# Altium PCB CLARA_Mainboard.PcbDoc
Units mm, origin at the board's own origin, x right, y up, seen from the top; angles counter-clockwise.
Board outline 44.16 x 42.91 mm, 2 copper layers (Top Layer, Bottom Layer); 14 components, 5 nets, 99 pads, 22 vias.
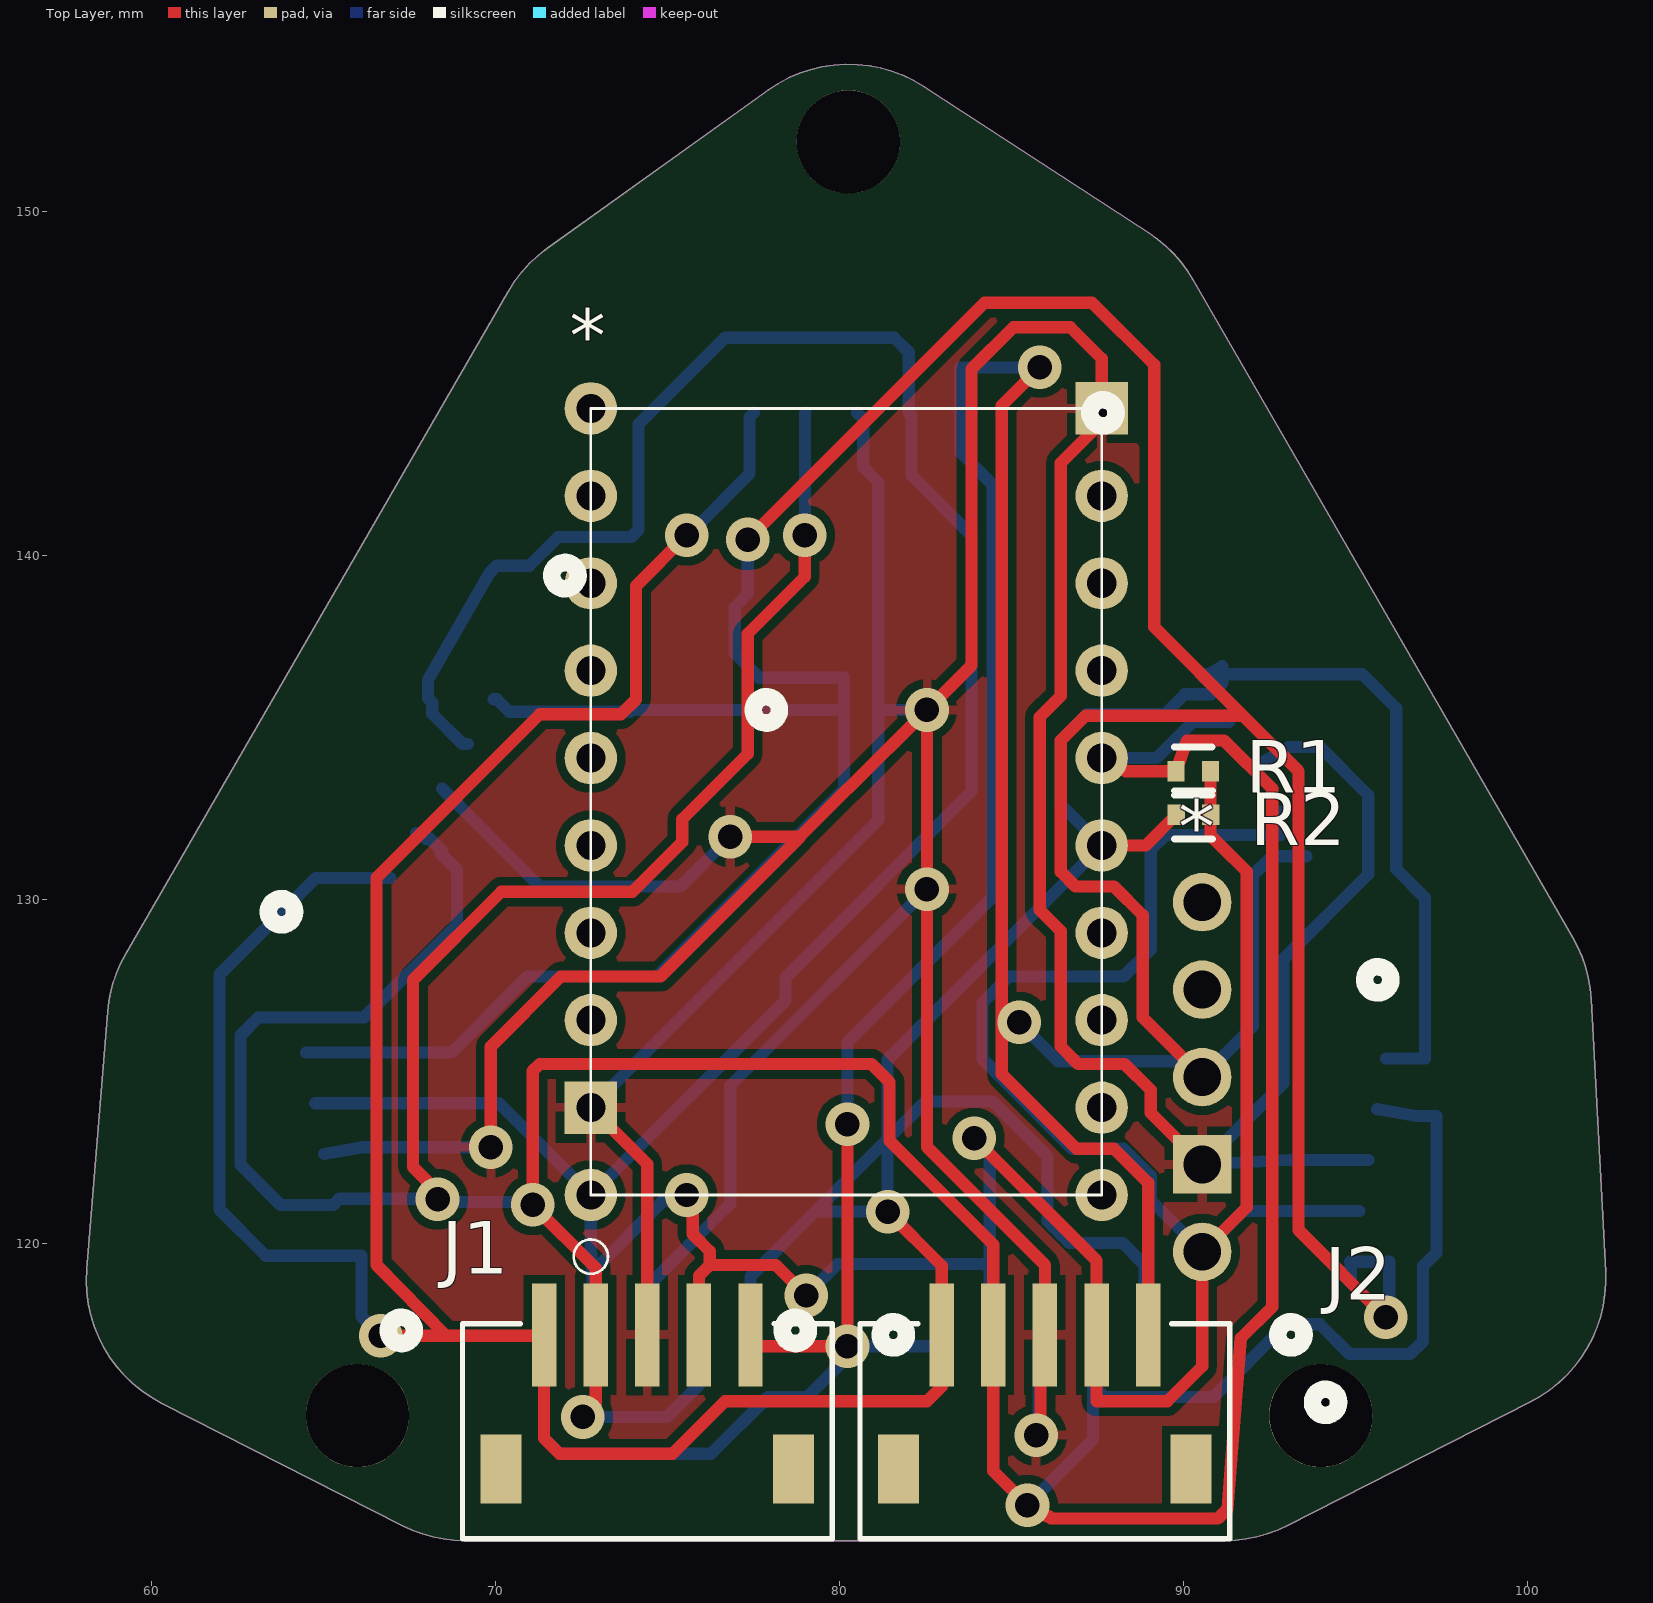
[diagram p0: Top Layer view]
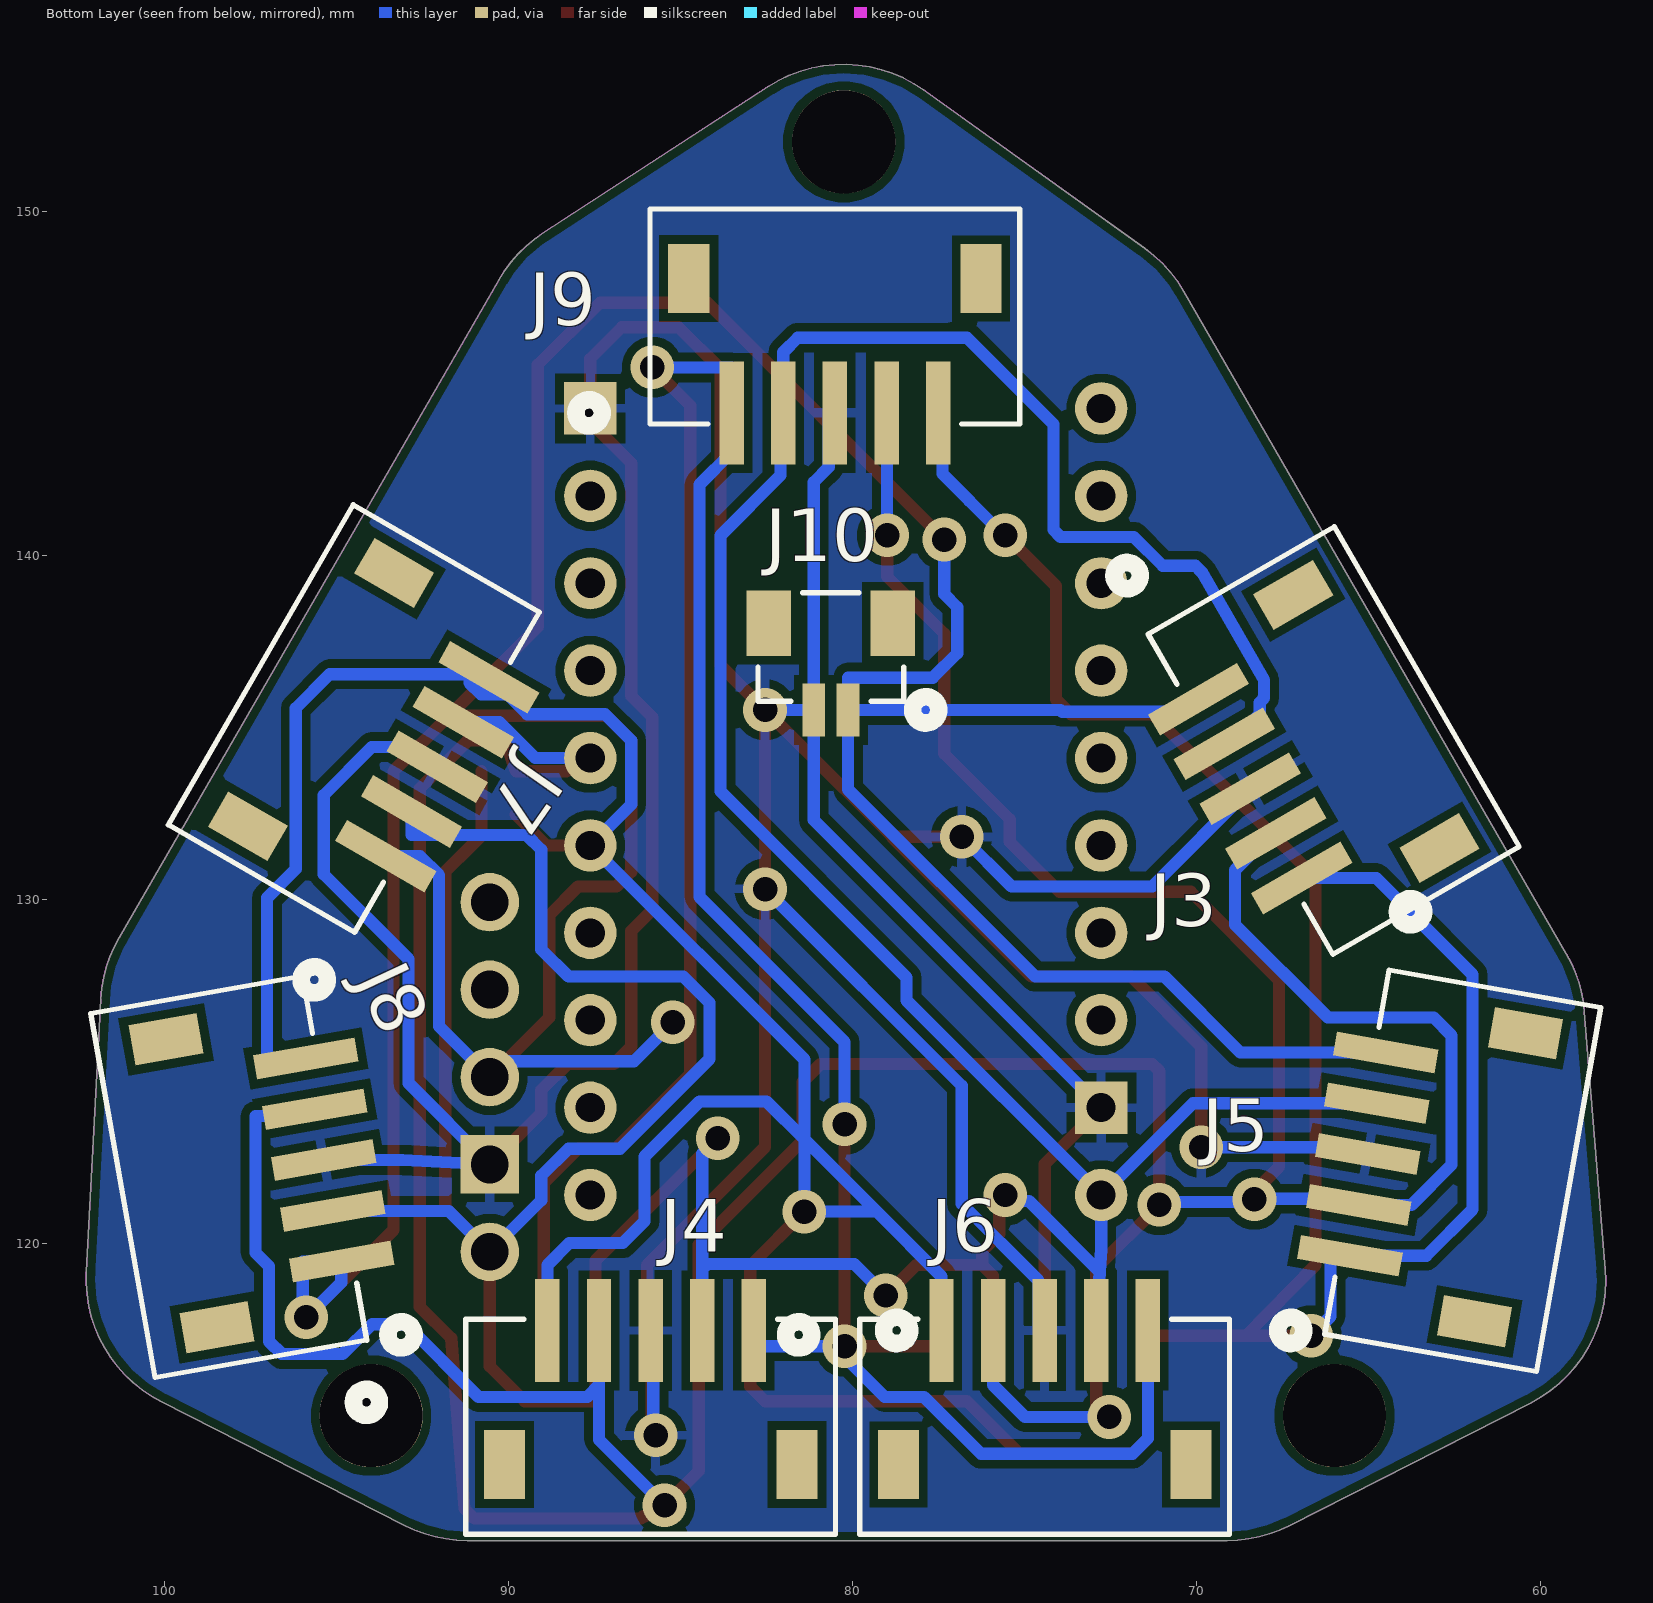
[diagram p1: Bottom Layer view, seen from below]

## Layer stack, top to bottom
Top Solder: solder mask 0.0102, Solder Resist, Dk 3.5
Top Layer: signal copper 0.0356
Dielectric 1: dielectric 0.32, FR-4, Dk 4.8
Bottom Layer: signal copper 0.0356
Bottom Solder: solder mask 0.0102, Solder Resist, Dk 3.5

## Board outline
60.303,115.364 67.307,111.801 ccw(c69.121,115.366) 69.121,111.366 91.203,111.366 ccw(c91.203,115.366) 93.017,111.801 100.093,115.401 ccw(c98.28,118.966) 102.274,119.178 101.853,127.107 ccw(c97.859,126.895) 101.323,128.895 90.282,148.019 ccw(c86.818,146.019) 88.999,149.372 82.451,153.63 ccw(c80.27,150.277) 77.942,153.529 71.515,148.927 ccw(c73.844,145.675) 70.379,147.675 59.262,128.418 ccw(c62.726,126.418) 58.739,126.742 58.13,119.254 ccw(c62.116,118.93)

## Design rules (kind name [scope] priority, off if disabled: settings)
Clearance [All] p1: gap=0.254 ignorepadtopadclearanceinfootprint=FALSE except(0: Arc-Hole Track-Hole SMDPad-Hole THPad-Hole Via-Hole Fill-Hole Poly-Hole Region-Hole Text-Hole)
HoleSize [All] p1: absolutevalues=TRUE maxlimit=2.54 minlimit=0.3 maxpercent=80.000 minpercent=20.000
PolygonConnect [All] p1: connectstyle=Relief reliefconductorwidth=0.254 reliefentries=4 polygonreliefangle="90 Angle" airgapwidth=0.254
RoutingVias [All] p1: holewidth=0.711 width=1.27 viastyle="Through Hole" minholewidth=0.3 minwidth=1.27 maxholewidth=0.711 maxwidth=1.27
SolderMaskExpansion SolderMaskExpansion_1 [All] p1 off: expansion=0.102 istentingtop=FALSE
SolderMaskExpansion [IsVia] p2: expansion=0.102 istentingtop=TRUE
Width [All] p1: maxlimit=0.356 minlimit=0.356 preferedwidth=0.356 minimp=50.000000 maximp=50.000000 favimp=50.000000
29 further rules are at their usual default settings.

## Components (designator, comment, footprint, x,y, rotation, side; value= is the part's Value field where it differs from the comment)
* "Pololu D24V10F3 3.3V Buck Regulator" PCBComponent_1 90.551,119.761 r0 top
* "TinyPICO" "TinyPICO Board" 65.16,118.872 r90 top
J1 "S5B-ZR-SM4A-TF (LF) (SN)" CONN_S5B-ZR-SM4A-TF_JST 77.422,117.348 r180 top
J2 "S5B-ZR-SM4A-TF (LF) (SN)" CONN_S5B-ZR-SM4A-TF_JST 88.979,117.348 r180 top
J3 "S5B-ZR-SM4A-TF (LF) (SN)" CONN_S5B-ZR-SM4A-TF_JST 69.953,135.821 r240 bottom
J4 "S5B-ZR-SM4A-TF (LF) (SN)" CONN_S5B-ZR-SM4A-TF_JST 82.876,117.475 r0 bottom
J5 "S5B-ZR-SM4A-TF (LF) (SN)" CONN_S5B-ZR-SM4A-TF_JST 64.51,125.556 r280 bottom
J6 "S5B-ZR-SM4A-TF (LF) (SN)" CONN_S5B-ZR-SM4A-TF_JST 71.422,117.475 r0 bottom
J7 "S5B-ZR-SM4A-TF (LF) (SN)" CONN_S5B-ZR-SM4A-TF_JST 93.575,131.26 r120 bottom
J8 "S5B-ZR-SM4A-TF (LF) (SN)" CONN_S5B-ZR-SM4A-TF_JST 94.856,119.474 r80 bottom
J9 "S5B-ZR-SM4A-TF (LF) (SN)" CONN_S5B-ZR-SM4A-TF_JST 83.518,144.145 r180 bottom
J10 "BM02B-SRSS-TB (LF)(SN)" CONN_BM02B-SRSS-TB_JST 80.637,137.339 r0 bottom
R1 "RMCF0402JT4K70 - 4.7 kOhm - 1/16W" FP-RMCF0402-MFG 90.289,133.731 r0 top
R2 "RMCF0402JT4K70 - 4.7 kOhm - 1/16W" FP-RMCF0402-MFG 90.297,132.461 r0 top

## Footprints (in the part's own frame and the unit in brackets; to place one, negate y for a bottom-side part, rotate by r counter-clockwise, add the part's x,y. Pads: shape width x height; smd on the part's side, far side on the other; paste and mask are expansions set on the pad)
CONN_BM02B-SRSS-TB_JST [mil]
  rect 26x61 smd paste+0 mask+0: 1(-19.68,72.04) 2(19.69,72.04)
  rect 51x75 smd: 3(-70.87,-27.37) 4(70.87,-27.37)
  silkscreen extent -123,-62 84,87, body extent 0,0 10,10, height 10
CONN_S5B-ZR-SM4A-TF_JST [mil]
  rect 28x118 smd paste+0 mask+0: 1(0,0) 2(59.05,0) 3(118.11,0) 4(177.17,0) 5(236.22,0)
  rect 47x79 smd: 6(-49.21,153.62) 7(285.43,153.62)
  silkscreen extent -178,-15 330,233, body extent 0,0 10,10, height 10
FP-RMCF0402-MFG [mm]
  rect 0.5x0.6 smd paste+0 mask+0: 1(-0.5,0) 2(0.5,0)
  silkscreen extent -0.55,-0.7 0.55,0.7, body extent -0.85,-0.4 0.85,0.4, height 0.25
PCBComponent_1 [mm]
  rect 1.7x1.7 hole 1.1: GND(0,2.54)
  round 1.7 hole 1.1: PG(0,10.16) SHDN(0,7.62) VIN(0,5.08) VOUT(0,0)
"TinyPICO Board" [mil]
  round 60 hole 33.23: 3V3(400,-300) 4(500,-300) 5(400,-884.65) 5V(300,-300) 14(600,-300) 15(700,-300) 18(300,-884.65) 19(200,-884.65) 21(600,-884.65) 22(500,-884.65) 25(1000,-300) 26(900,-300) 27(800,-300) 32(700,-884.65) 33(800,-884.65) RST(900,-884.65)
  round 60 hole 33.24: 23(100,-884.65) BAT(100,-300)
  rect 60x60 hole 33.23: G(200,-300) G(1000,-884.65)
  Top Layer lines w10: 1000,-869.29 992.32,-876.97 989.82,-879.47 984.65,-884.65
  silkscreen extent 10,-885 1000,-280

## Part data
*: library part Component_1
J1 J2 J3 J4 J5 J6 J7 J8 J9 J10: "No Description Available", Mfr_Name=JST, Copyright="Copyright (C) 2021 Ultra Librarian. All rights reserved.", RefDes=RefDes, Type=DEV
  J1 J2 J3 J4 J5 J6 J7 J8 J9: Manufacturer_Part_Number="S5B-ZR-SM4A-TF (LF) (SN)"
  J10: Manufacturer_Part_Number="BM02B-SRSS-TB (LF)(SN)"
R1 R2: library part CMP-2000-06988-2, "4.7kΩ ±5% 0.063W 0402 Thick Film Chip Resistor AEC-Q200 compliant", Case Code (Imperial)=0402, Case Code (Metric)=1005, Max Operating Temperature=155°C, Max Power Dissipation=63mW, Min Operating Temperature=-55°C, Resistance=4.7kR, Resistor Type="Thick Film", Temperature Coefficient=100ppm/°C, Tolerance=5%, Case/Package=0402, Construction=Rectangular, Contact Plating=Tin, Depth=0.5mm, Features="Automotive AEC-Q200", Height=0.016inch, Lead Free="Lead Free", Length=0.039inch, Military Standard=Not, Mount="Surface Mount", Number of Terminations=2, Packaging="Tape and Reel", Power Rating=63mW, Radiation Hardening=No, RoHS Compliant=Yes, Series=RMCF, Width=0.02inch

## Free pads (board coordinates)
  round 3 hole 3 unplated: 4(66,115) 4(80.264,152.019) 4(94,115)

## Via types
v1: diameter 1.27, hole 0.711, Top Layer to Bottom Layer, tented both sides, 22 vias

## Nets (pads, with @x,y where several pads share a name; then routed paths per layer and width w, separated by ;. In a path a pad name is that pad's centre, name@x,y a point inside that pad or via, vN(x,y) a via of type N, cw(c..) or ccw(c..) an arc to the next point about the centre after c; other vN are vias at no path point)
GND: *.G *.GND J1.3 J2.3 J3.3 J4.3 J5.3 J6.3 J7.3 J8.3 J9.3 J10.2 | length 175.2
  Top Layer w0.356: v1(69.875,122.8) 69.875,125.73 71.907,127.762 74.803,127.762 78.86,131.819 ; *.G@72.78,123.952 74.422,122.31 J1.3 ; v1(76.835,131.826) 78.853,131.826 80.25,133.223 ; 80.264,133.223 v1(82.55,135.509) ; v1(85.725,114.427) 85.852,114.554 85.852,117.221 J2.3 85.979,119.38 82.55,122.809 v1(82.55,130.302) v1(82.55,135.509) ; *.G@87.24,144.272 *.G@87.63,144.272 ; *.GND 89.052,123.8 89.052,124.46 88.29,125.222 86.944,125.222 86.436,125.73 86.436,129.083 85.827,129.692 85.827,135.306 86.436,135.915 86.436,142.688 87.63,143.882 *.G@87.63,144.272 ; v1(82.55,135.509) 83.845,136.804 83.845,145.415 85.065,146.634 86.716,146.634 87.63,145.72 *.G@87.63,144.272
  Bottom Layer w0.356: J5.3 66.156,122.8 v1(69.875,122.8) ; J3.3 71.298,130.378 75.387,130.378 v1(76.835,131.826) ; *.G@72.78,123.952 81.137,132.309 J10.2 ; J6.3 74.6,117.653 74.6,118.923 76.835,121.158 76.835,124.587 v1(82.55,130.302) ; J9.3 80.696,143.967 80.696,142.57 81.137,142.129 J10.2 ; v1(82.55,135.509) J10.2 ; v1(85.725,114.427) 85.801,114.503 85.801,117.399 J4.3 ; J7.3 93.065,134.429 93.98,134.429 95.377,133.032 95.377,130.734 92.913,128.27 92.913,124.663 *.GND 93.091,122.428 J8.3
SCL: *.22 J1.5 J2.5 J3.5 J4.5 J5.5 J6.5 J7.5 J8.5 J9.5 R2.1 | length 145.6
  Top Layer w0.356: v1(66.675,117.323) 68.58,117.323 ; J1.5 J1.5@71.422,117.323 ; v1(75.565,140.589) 74.092,139.116 74.092,135.814 73.66,135.382 71.298,135.382 66.548,130.632 66.548,119.38 68.58,117.323 ; v1(81.407,120.929) 82.979,119.357 J2.5 82.979,115.847 82.55,115.418 76.679,115.418 75.155,113.894 71.871,113.894 71.422,114.343 J1.5@71.422,117.323 ; *.22 88.908,131.572 R2.1 ; 68.58,117.323 J1.5@71.422,117.323
  Bottom Layer w0.356: v1(66.675,117.323) 66.116,117.881 66.116,119.647 J5.5 63.334,119.647 61.987,120.995 61.987,127.824 64.788,130.625 J3.5 ; v1(75.565,140.589) 75.613,140.589 76.614,141.59 76.614,141.597 77.391,142.374 77.391,144.018 J9.5 ; J6.5 77.422,119.046 79.306,120.929 ; J4.5 88.876,119.38 88.241,120.015 86.687,120.015 86.052,120.65 86.052,122.533 84.455,124.13 82.506,124.13 81.407,123.031 ; J8.5 97.028,125.382 97.028,130.048 96.19,130.886 96.19,135.56 95.199,136.55 J7.5@91.136,136.55 ; 79.306,120.929 81.407,123.031 ; 79.306,120.929 v1(81.407,120.929) 81.407,123.031 ; 81.407,123.031 81.407,125.349 *.22 86.436,132.766 86.436,134.62 87.198,135.382 89.459,135.382 90.043,135.966 90.805,135.966 91.136,136.297 J7.5@91.136,136.55 ; J7.5@90.738,136.55 J7.5@91.136,136.55 ; J7.5@90.738,136.55 90.669,136.55 J7.5 J7.5@90.738,136.55 ; J7.5@90.738,136.55 91.136,136.78 J7.5@91.136,136.55
SDA: *.21 J1.4 J2.4 J3.4 J4.4 J5.4 J6.4 J7.4 J8.4 J9.4 R1.1 | length 158.2
  Top Layer w0.356: v1(68.326,121.285) 68.326,121.515 67.615,122.226 67.615,127.66 70.18,130.226 73.99,130.226 75.438,131.674 75.438,132.334 77.343,134.239 77.343,137.722 78.999,139.378 v1(78.999,140.584) ; v1(72.542,114.96) 72.922,115.34 J1.4 72.922,119.293 v1(71.09,121.125) 71.09,125.014 71.298,125.222 80.939,125.222 81.462,124.699 81.462,122.987 84.479,119.969 J2.4 84.479,113.387 v1(85.471,112.395) 85.718,112.395 86.038,112.075 86.092,112.075 86.157,112.011 91.005,112.011 91.286,112.292 91.669,117.246 92.583,118.161 92.583,133.223 91.186,134.62 90.106,134.62 R1.1 88.327,133.731 87.946,134.112 *.21
  Bottom Layer w0.356: J3.4 67.824,131.924 J3.4@67.988,131.759 ; J3.4@68.049,131.82 68.467,131.402 J3.4@68.426,131.351 ; J3.4@68.411,131.336 68.891,130.857 68.891,129.267 66.192,126.568 63.117,126.568 62.596,126.047 62.596,122.29 63.762,121.125 J5.4 65.47,121.304 68.307,121.304 v1(68.326,121.285) 68.406,121.205 71.01,121.205 v1(71.09,121.125) ; v1(72.542,114.96) 74.995,114.96 75.922,115.887 J6.4 ; v1(78.999,140.584) 79.009,140.593 79.009,144.136 J9.4 ; v1(85.471,112.395) 87.376,114.3 87.376,115.887 ; J4.4 87.376,115.887 ; *.21 89.23,134.112 90.275,135.157 J7.4 ; J8.4 96.763,123.707 97.358,123.707 97.358,119.736 96.964,119.341 96.964,117.157 96.594,116.787 94.83,116.787 93.965,117.653 92.989,117.653 90.881,115.545 87.719,115.545 87.376,115.887
VBAT: *.VIN J1.1 J2.1 J3.1 J4.1 J5.1 J6.1 J7.1 J8.1 J9.1 J10.1 | length 206.9
  Top Layer w0.356: v1(77.343,140.462) 84.226,147.345 87.351,147.345 89.154,145.542 89.154,137.922 91.754,135.322 ; J1.1 77.422,117.018 v1(80.239,117.018) ; v1(80.239,123.469) v1(80.239,117.018) ; v1@80.543,117.018 v1(80.239,117.018) ; v1(85.23,126.428) 84.723,126.936 ; v1(85.827,145.466) 84.723,144.362 84.723,126.936 ; J2.1 88.979,121.765 87.986,122.758 86.893,122.758 84.723,124.929 84.723,126.936 ; *.VIN 88.824,126.568 88.824,129.54 87.986,130.378 86.868,130.378 86.436,130.81 86.436,134.62 87.155,135.338 91.738,135.338 93.345,133.731 93.345,120.396 v1(95.885,117.856)
  Bottom Layer w0.356: J5.1 68.736,125.556 70.942,127.762 74.698,127.762 80.137,133.201 J10.1 ; J3.1 70.046,135.821 70.409,135.458 73.914,135.458 73.965,135.509 J10.1 ; J6.1 71.422,114.343 71.871,113.894 76.276,113.894 77.927,115.545 79.07,115.545 v1@80.543,117.018 ; v1(77.343,140.462) 77.343,138.878 76.962,138.497 76.962,137.16 77.673,136.449 80.137,136.449 J10.1 ; v1(80.239,117.018) v1@80.543,117.018 ; v1(80.239,123.469) 80.239,125.857 84.455,130.073 84.455,142.065 83.518,143.002 83.518,145.466 v1(85.827,145.466) ; J4.1 82.876,117.018 v1@80.543,117.018 ; v1(85.23,126.428) 86.36,125.298 90.094,125.298 *.VIN 92.024,126.314 92.024,130.708 92.576,131.26 J7.1 ; J8.1 J8.1@94.869,119.474 ; J8.1@94.869,119.474 94.869,118.872 v1(95.885,117.856) 95.987,117.958 95.987,119.474 J8.1@94.869,119.474
VCC: *.BAT *.VOUT J1.2 J2.2 J3.2 J4.2 J5.2 J6.2 J7.2 J8.2 J9.2 R1.2 R2.2 | length 148.5
  Top Layer w0.356: v1(75.565,121.412) 75.74,121.237 75.74,120.278 76.24,119.779 76.24,119.38 ; J1.2 75.922,119.062 76.24,119.38 ; v1(79.045,118.491) 78.156,119.38 76.24,119.38 ; v1(83.922,123.063) 87.479,119.506 J2.2 87.479,115.418 89.535,115.418 90.551,116.434 *.VOUT 91.846,121.056 91.846,130.81 91.084,131.572 90.793,131.864 90.793,132.457 R2.2 ; R2.2@90.789,132.461 R1.2
  Bottom Layer w0.356: J5.2 70.113,124.079 *.BAT ; J3.2 69.053,134.522 68.174,135.401 68.174,135.728 68.046,135.856 68.046,136.378 69.861,139.522 70.039,139.7 70.993,139.7 71.831,140.538 73.96,140.538 74.168,140.747 74.168,143.815 76.683,146.329 81.597,146.329 82.018,145.909 J9.2 82.1,144.063 82.1,142.329 83.845,140.583 83.845,133.147 78.435,127.737 78.435,127.067 *.BAT ; J6.2 72.82,119.175 ; v1(75.565,121.412) 75.39,121.237 74.882,121.237 72.82,119.175 ; v1(79.045,118.491) 79.959,119.405 84.224,119.405 84.376,119.253 ; v1(83.922,123.063) 84.376,122.609 84.376,119.253 ; J4.2 84.376,119.253 ; J7.2 92.825,131.877 89.484,131.877 89.052,131.445 89.052,128.549 88.265,127.762 84.925,127.762 84.163,127 84.163,125.362 86.766,122.758 88.265,122.758 89.052,121.971 89.052,121.26 *.VOUT 91.741,120.951 J8.2 ; *.BAT 72.78,119.837 72.806,119.407 72.82,119.175
pads on no net: *.3V3 *.4 *.5 *.5V *.14 *.15 *.18 *.19 *.23 *.25 *.26 *.27 *.32 *.33 *.PG *.RST *.SHDN J1.6 J1.7 J2.6 J2.7 J3.6 J3.7 J4.6 J4.7 J5.6 J5.7 J6.6 J6.7 J7.6 J7.7 J8.6 J8.7 J9.6 J9.7 J10.3 J10.4

## Polygon pours and split planes (outlines as drawn)
GND on Top Layer "GND_L01_P000" (solid, remove dead copper, pour order 0): 41.275,161.163 119.38,161.163 121.793,158.75 120.65,157.607 120.65,107.061 39.624,107.061 39.243,107.442
GND on Bottom Layer "GND_L02_P001" (solid, remove dead copper, pour order 1): 42.418,161.036 48.006,155.448 118.999,155.448 118.999,114.808 113.665,109.474 49.149,109.474

## Keep-outs
Keep-Out Layer:
  the board outline again, w0.013

## Silkscreen, mask and mechanical layers (free items; w line width, h text height)
Mechanical 1:
  lines w0.013: 67.064,113.731 ccw(c67.497,113.981) 67.93,114.231 ; 92.417,114.268 ccw(c92.85,114.018) 93.283,113.768

## Text inside footprints (layer, text, board x,y; h text height)
J1: Mechanical 7 "Default Padstyle: RX28Y118D0T" at 83.629,122.911 h1.27 r180; Mechanical 7 "1st Mtg Padstyle: RX79Y47D0T" at 83.312,124.816 h1.27 r180; Mechanical 7 "2nd Mtg Padstyle: EX70Y70D70P" at 83.629,126.721 h1.27 r180; Mechanical 7 "3rd Mtg Padstyle: EX70Y70D70P" at 83.629,128.626 h1.27 r180; Mechanical 7 "Left Mtg Padstyle: EX60Y60D30P" at 83.947,130.531 h1.27 r180; Mechanical 7 "Right Mtg Padstyle: EX60Y60D30P" at 84.264,132.436 h1.27 r180; Mechanical 7 "Alt Padstyle 1: OX60Y90D30P" at 82.995,134.341 h1.27 r180; Mechanical 7 "Alt Padstyle 2: OX90Y60D30P" at 82.995,136.246 h1.27 r180; Mechanical 7 "0.059in/1.5mm" at 78.736,108.882 h0.64 r180; Mechanical 7 "0.335in/8.5mm" at 76.486,103.167 h0.64 r180; Mechanical 7 "0.413in/10.49mm" at 76.803,100.627 h0.64 r180; Mechanical 7 "0in/0mm" at 66.129,117.665 h0.64 r180; Mechanical 7 "0.154in/3.902mm" at 87.105,115.714 h0.64 r180; Mechanical 7 "0.228in/5.799mm" at 95.36,114.766 h0.64 r180; Mechanical 7 "0.236in/5.994mm" at 94.09,114.864 h0.64 r180
J2: Mechanical 7 "0.236in/5.994mm" at 105.647,114.864 h0.64 r180; Mechanical 7 "0.228in/5.799mm" at 106.917,114.766 h0.64 r180; Mechanical 7 "0.154in/3.902mm" at 98.662,115.715 h0.64 r180; Mechanical 7 "0in/0mm" at 77.686,117.666 h0.64 r180; Mechanical 7 "0.413in/10.49mm" at 88.36,100.627 h0.64 r180; Mechanical 7 "0.335in/8.5mm" at 88.043,103.167 h0.64 r180; Mechanical 7 "0.059in/1.5mm" at 90.293,108.882 h0.64 r180; Mechanical 7 "Alt Padstyle 2: OX90Y60D30P" at 94.552,136.246 h1.27 r180; Mechanical 7 "Alt Padstyle 1: OX60Y90D30P" at 94.552,134.341 h1.27 r180; Mechanical 7 "3rd Mtg Padstyle: EX70Y70D70P" at 95.187,128.626 h1.27 r180; Mechanical 7 "2nd Mtg Padstyle: EX70Y70D70P" at 95.187,126.721 h1.27 r180; Mechanical 7 "1st Mtg Padstyle: RX79Y47D0T" at 94.869,124.816 h1.27 r180; Mechanical 7 "Default Padstyle: RX28Y118D0T" at 95.187,122.911 h1.27 r180
J3: Mechanical 7 "Default Padstyle: RX28Y118D0T" at 77.874,138.416 h1.27 r60; Mechanical 7 "2nd Mtg Padstyle: EX70Y70D70P" at 81.174,136.511 h1.27 r60; Mechanical 7 "3rd Mtg Padstyle: EX70Y70D70P" at 82.823,135.558 h1.27 r60; Mechanical 7 "Left Mtg Padstyle: EX60Y60D30P" at 84.632,134.881 h1.27 r60; Mechanical 7 "Right Mtg Padstyle: EX60Y60D30P" at 86.441,134.203 h1.27 r60; Mechanical 7 "Alt Padstyle 1: OX60Y90D30P" at 87.455,132.151 h1.27 r60; Mechanical 7 "Alt Padstyle 2: OX90Y60D30P" at 89.105,131.198 h1.27 r60; Mechanical 7 "0.059in/1.5mm" at 63.278,141.192 h0.64 r60; Mechanical 7 "0.335in/8.5mm" at 57.204,142.101 h0.64 r60; Mechanical 7 "0.413in/10.49mm" at 55.163,143.646 h0.64 r60; Mechanical 7 "0in/0mm" at 64.581,125.882 h0.64 r60; Mechanical 7 "0.154in/3.902mm" at 73.38,145.023 h0.64 r60; Mechanical 7 "0.228in/5.799mm" at 76.686,152.647 h0.64 r60; Mechanical 7 "0.236in/5.994mm" at 76.135,151.498 h0.64 r60
J4: Mechanical 7 "0.236in/5.994mm" at 66.208,114.991 h0.64 r180; Mechanical 7 "0.228in/5.799mm" at 64.938,114.893 h0.64 r180; Mechanical 7 "0.154in/3.902mm" at 73.193,115.842 h0.64 r180; Mechanical 7 "0in/0mm" at 94.169,117.793 h0.64 r180; Mechanical 7 "0.413in/10.49mm" at 83.495,100.754 h0.64 r180; Mechanical 7 "0.335in/8.5mm" at 83.812,103.294 h0.64 r180; Mechanical 7 "0.059in/1.5mm" at 81.562,109.009 h0.64 r180; Mechanical 7 "Alt Padstyle 2: OX90Y60D30P" at 77.304,136.373 h1.27 r180; Mechanical 7 "Alt Padstyle 1: OX60Y90D30P" at 77.304,134.468 h1.27 r180; Mechanical 7 "Right Mtg Padstyle: EX60Y60D30P" at 76.034,132.563 h1.27 r180; Mechanical 7 "Left Mtg Padstyle: EX60Y60D30P" at 76.351,130.658 h1.27 r180; Mechanical 7 "2nd Mtg Padstyle: EX70Y70D70P" at 76.669,126.848 h1.27 r180; Mechanical 7 "Default Padstyle: RX28Y118D0T" at 76.669,123.038 h1.27 r180
J5: Mechanical 7 "2nd Mtg Padstyle: EX70Y70D70P" at 72.662,133.297 h1.27 r100; Mechanical 7 "3rd Mtg Padstyle: EX70Y70D70P" at 74.538,133.628 h1.27 r100; Mechanical 7 "Left Mtg Padstyle: EX60Y60D30P" at 76.359,134.271 h1.27 r100; Mechanical 7 "Right Mtg Padstyle: EX60Y60D30P" at 78.18,134.915 h1.27 r100; Mechanical 7 "Alt Padstyle 1: OX60Y90D30P" at 80.276,133.995 h1.27 r100; Mechanical 7 "Alt Padstyle 2: OX90Y60D30P" at 82.152,134.326 h1.27 r100; Mechanical 7 "0.059in/1.5mm" at 55.944,125.38 h0.64 r100; Mechanical 7 "0.335in/8.5mm" at 50.707,122.172 h0.64 r100; Mechanical 7 "0.413in/10.49mm" at 48.15,122.043 h0.64 r100; Mechanical 7 "0in/0mm" at 66.783,114.49 h0.64 r100; Mechanical 7 "0.154in/3.902mm" at 61.219,134.808 h0.64 r100; Mechanical 7 "0.228in/5.799mm" at 58.852,142.773 h0.64 r100; Mechanical 7 "0.236in/5.994mm" at 59.169,141.539 h0.64 r100
J6: Mechanical 7 "0.236in/5.994mm" at 54.754,114.991 h0.64 r180; Mechanical 7 "0.228in/5.799mm" at 53.484,114.893 h0.64 r180; Mechanical 7 "0.154in/3.902mm" at 61.739,115.842 h0.64 r180; Mechanical 7 "0in/0mm" at 82.715,117.793 h0.64 r180; Mechanical 7 "0.413in/10.49mm" at 72.041,100.754 h0.64 r180; Mechanical 7 "0.335in/8.5mm" at 72.358,103.294 h0.64 r180; Mechanical 7 "0.059in/1.5mm" at 70.108,109.009 h0.64 r180; Mechanical 7 "Alt Padstyle 2: OX90Y60D30P" at 65.849,136.373 h1.27 r180; Mechanical 7 "Alt Padstyle 1: OX60Y90D30P" at 65.849,134.468 h1.27 r180; Mechanical 7 "Left Mtg Padstyle: EX60Y60D30P" at 64.897,130.658 h1.27 r180; Mechanical 7 "3rd Mtg Padstyle: EX70Y70D70P" at 65.214,128.753 h1.27 r180; Mechanical 7 "2nd Mtg Padstyle: EX70Y70D70P" at 65.214,126.848 h1.27 r180; Mechanical 7 "1st Mtg Padstyle: RX79Y47D0T" at 65.532,124.943 h1.27 r180; Mechanical 7 "Default Padstyle: RX28Y118D0T" at 65.214,123.038 h1.27 r180
J7: Mechanical 7 "Default Padstyle: RX28Y118D0T" at 91.861,123.103 h1.27 r300; Mechanical 7 "1st Mtg Padstyle: RX79Y47D0T" at 90.053,122.425 h1.27 r300; Mechanical 7 "2nd Mtg Padstyle: EX70Y70D70P" at 88.562,121.198 h1.27 r300; Mechanical 7 "3rd Mtg Padstyle: EX70Y70D70P" at 86.912,120.245 h1.27 r300; Mechanical 7 "Right Mtg Padstyle: EX60Y60D30P" at 83.93,117.79 h1.27 r300; Mechanical 7 "Alt Padstyle 1: OX60Y90D30P" at 81.645,117.938 h1.27 r300; Mechanical 7 "0.059in/1.5mm" at 101.564,134.355 h0.64 r300; Mechanical 7 "0.335in/8.5mm" at 105.388,139.161 h0.64 r300; Mechanical 7 "0.413in/10.49mm" at 107.746,140.156 h0.64 r300; Mechanical 7 "0in/0mm" at 87.653,140.881 h0.64 r300; Mechanical 7 "0.154in/3.902mm" at 99.831,123.691 h0.64 r300; Mechanical 7 "0.228in/5.799mm" at 104.78,117.016 h0.64 r300; Mechanical 7 "0.236in/5.994mm" at 104.06,118.067 h0.64 r300
J8: Mechanical 7 "Default Padstyle: RX28Y118D0T" at 88.3,114.326 h1.27 r260; Mechanical 7 "2nd Mtg Padstyle: EX70Y70D70P" at 84.548,114.988 h1.27 r260; Mechanical 7 "3rd Mtg Padstyle: EX70Y70D70P" at 82.672,115.319 h1.27 r260; Mechanical 7 "Left Mtg Padstyle: EX60Y60D30P" at 80.741,115.337 h1.27 r260; Mechanical 7 "Right Mtg Padstyle: EX60Y60D30P" at 78.809,115.355 h1.27 r260; Mechanical 7 "Alt Padstyle 1: OX60Y90D30P" at 77.154,116.936 h1.27 r260; Mechanical 7 "Alt Padstyle 2: OX90Y60D30P" at 75.278,117.267 h1.27 r260; Mechanical 7 "0.059in/1.5mm" at 102.965,116.71 h0.64 r260; Mechanical 7 "0.335in/8.5mm" at 108.984,117.933 h0.64 r260; Mechanical 7 "0.413in/10.49mm" at 111.43,117.179 h0.64 r260; Mechanical 7 "0in/0mm" at 96.504,130.65 h0.64 r260; Mechanical 7 "0.154in/3.902mm" at 94.783,109.654 h0.64 r260; Mechanical 7 "0.228in/5.799mm" at 94.284,101.36 h0.64 r260; Mechanical 7 "0.236in/5.994mm" at 94.408,102.628 h0.64 r260
J9: Mechanical 7 "Default Padstyle: RX28Y118D0T" at 89.725,138.582 h1.27; Mechanical 7 "1st Mtg Padstyle: RX79Y47D0T" at 89.408,136.677 h1.27; Mechanical 7 "2nd Mtg Padstyle: EX70Y70D70P" at 89.725,134.772 h1.27; Mechanical 7 "3rd Mtg Padstyle: EX70Y70D70P" at 89.725,132.867 h1.27; Mechanical 7 "Left Mtg Padstyle: EX60Y60D30P" at 90.043,130.962 h1.27; Mechanical 7 "Right Mtg Padstyle: EX60Y60D30P" at 90.36,129.057 h1.27; Mechanical 7 "Alt Padstyle 1: OX60Y90D30P" at 89.09,127.152 h1.27; Mechanical 7 "Alt Padstyle 2: OX90Y60D30P" at 89.09,125.247 h1.27; Mechanical 7 "0.059in/1.5mm" at 84.832,152.611 h0.64; Mechanical 7 "0.335in/8.5mm" at 82.582,158.326 h0.64; Mechanical 7 "0.413in/10.49mm" at 82.899,160.866 h0.64; Mechanical 7 "0.154in/3.902mm" at 93.201,145.778 h0.64; Mechanical 7 "0.228in/5.799mm" at 101.456,146.727 h0.64; Mechanical 7 "0.236in/5.994mm" at 100.186,146.629 h0.64
J10: Mechanical 7 "Alt Padstyle 2: OX90Y60D30P" at 72.064,156.186 h1.27 r180; Mechanical 7 "0.039in/1mm" at 78.141,132.067 h0.64 r180; Mechanical 7 "0.142in/3.6mm" at 78.573,126.352 h0.64 r180; Mechanical 7 "0.157in/3.988mm" at 78.256,123.812 h0.64 r180; Mechanical 7 "0in/0mm" at 85.679,135.827 h0.64 r180; Mechanical 7 "-0.099in/-2.525mm" at 69.82,137.089 h0.64 r180; Mechanical 7 "-0.015in/-0.382mm" at 61.565,136.018 h0.64 r180; Mechanical 7 "0.114in/2.896mm" at 63.47,137.656 h0.64 r180